# Altium PCB ESP32S_package.PcbDoc
Units mil, origin at the board's own origin, x right, y up, seen from the top; angles counter-clockwise.
Board outline 6000 x 4000 mil, 2 copper layers (Top Layer, Bottom Layer); 1 components, 0 nets, 39 pads, 0 vias.
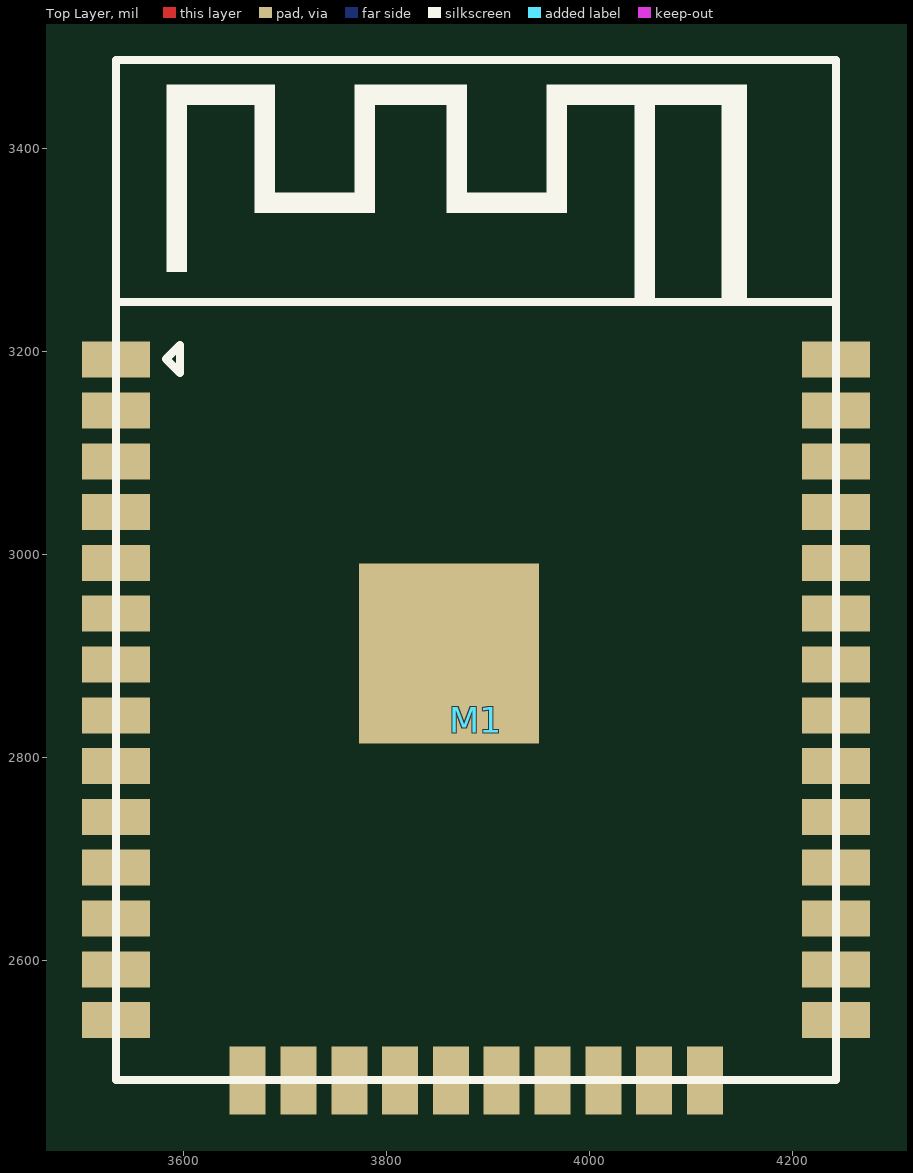
[diagram p0: Top Layer view]
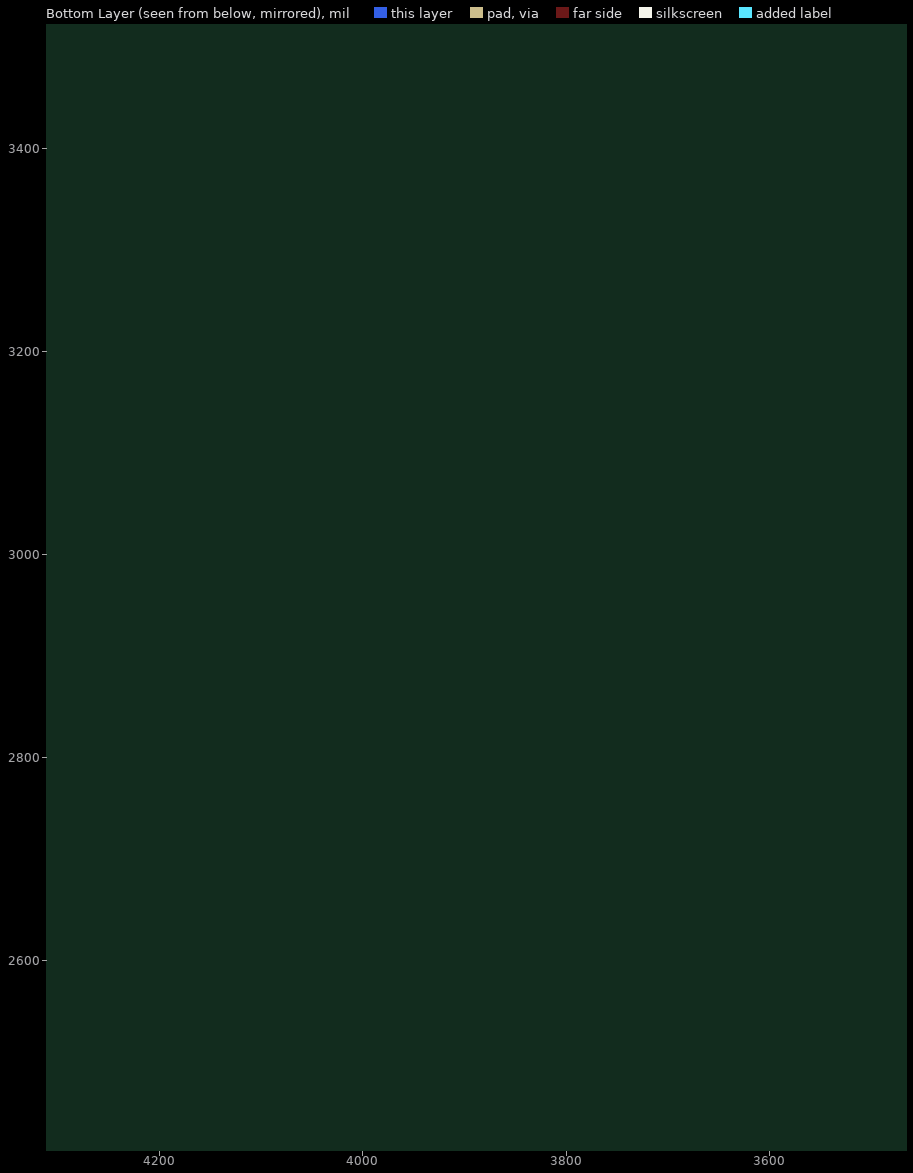
[diagram p1: Bottom Layer view, seen from below]

## Layer stack, top to bottom
Top Solder: solder mask 0.4, Solder Resist, Dk 3.5
Top Layer: signal copper 1.4
Dielectric 1: dielectric 12.6, FR-4, Dk 4.8
Bottom Layer: signal copper 1.4
Bottom Solder: solder mask 0.4, Solder Resist, Dk 3.5

## Board outline
1000,1000 7000,1000 7000,5000 1000,5000

## Design rules (kind name [scope] priority, off if disabled: settings)
Clearance [All] p1: gap=10
PolygonConnect [All] p1: connectstyle=Relief reliefconductorwidth=10 reliefentries=4 polygonreliefangle="90 Angle" airgapwidth=10
RoutingVias [All] p1: holewidth=28 width=50 viastyle="Through Hole" minholewidth=28 minwidth=50 maxholewidth=28 maxwidth=50
SolderMaskExpansion [All] p1: expansion=4
Width [All] p1: maxlimit=10 minlimit=10 preferedwidth=10
30 further rules are at their usual default settings.

## Components (designator, comment, footprint, x,y, rotation, side; value= is the part's Value field where it differs from the comment)
M1 "ESP32_Module" ESP32_Module 3888.5,2837 r0 top

## Footprints (in the part's own frame and the unit in brackets; to place one, negate y for a bottom-side part, rotate by r counter-clockwise, add the part's x,y. Pads: shape width x height; smd on the part's side, far side on the other; paste and mask are expansions set on the pad)
ESP32_Module [mm]
  rect 1.7x0.9 smd: 1(-9,9.01) 2(-9,7.74) 3(-9,6.47) 4(-9,5.2) 5(-9,3.93) 6(-9,2.66) 7(-9,1.39) 8(-9,0.12) 9(-9,-1.15) 10(-9,-2.42) 11(-9,-3.69) 12(-9,-4.96) 13(-9,-6.23) 14(-9,-7.5) 25(9,-7.5) 26(9,-6.23) 27(9,-4.96) 28(9,-3.69) 29(9,-2.42) 30(9,-1.15) 31(9,0.12) 32(9,1.39) 33(9,2.66) 34(9,3.93) 35(9,5.2) 36(9,6.47) 37(9,7.74) 38(9,9.01)
  rect 0.9x1.7 smd: 15(-5.71,-9.01) 16(-4.44,-9.01) 17(-3.17,-9.01) 18(-1.9,-9.01) 19(-0.63,-9.01) 20(0.64,-9.01) 21(1.91,-9.01) 22(3.18,-9.01) 23(4.45,-9.01) 24(5.72,-9.01)
  rect 4.5x4.5 smd: 39(-0.68,1.67)
  silkscreen extent -9,-9 9,16.5

## Nets (pads, with @x,y where several pads share a name; then routed paths per layer and width w, separated by ;. In a path a pad name is that pad's centre, name@x,y a point inside that pad or via, vN(x,y) a via of type N, cw(c..) or ccw(c..) an arc to the next point about the centre after c; other vN are vias at no path point)
pads on no net: M1.1 M1.2 M1.3 M1.4 M1.5 M1.6 M1.7 M1.8 M1.9 M1.10 M1.11 M1.12 M1.13 M1.14 M1.15 M1.16 M1.17 M1.18 M1.19 M1.20 M1.21 M1.22 M1.23 M1.24 M1.25 M1.26 M1.27 M1.28 M1.29 M1.30 M1.31 M1.32 M1.33 M1.34 M1.35 M1.36 M1.37 M1.38 M1.39